# Altium PCB VOLTAGE_MEASURE_AC_RT.PcbDoc
Units mil, origin at the board's own origin, x right, y up, seen from the top; angles counter-clockwise.
Board outline 900 x 1360 mil, 2 copper layers (Top Layer, Bottom Layer); 12 components, 8 nets, 42 pads, 0 vias.
Unrouted connection lines stored in the file: 1.
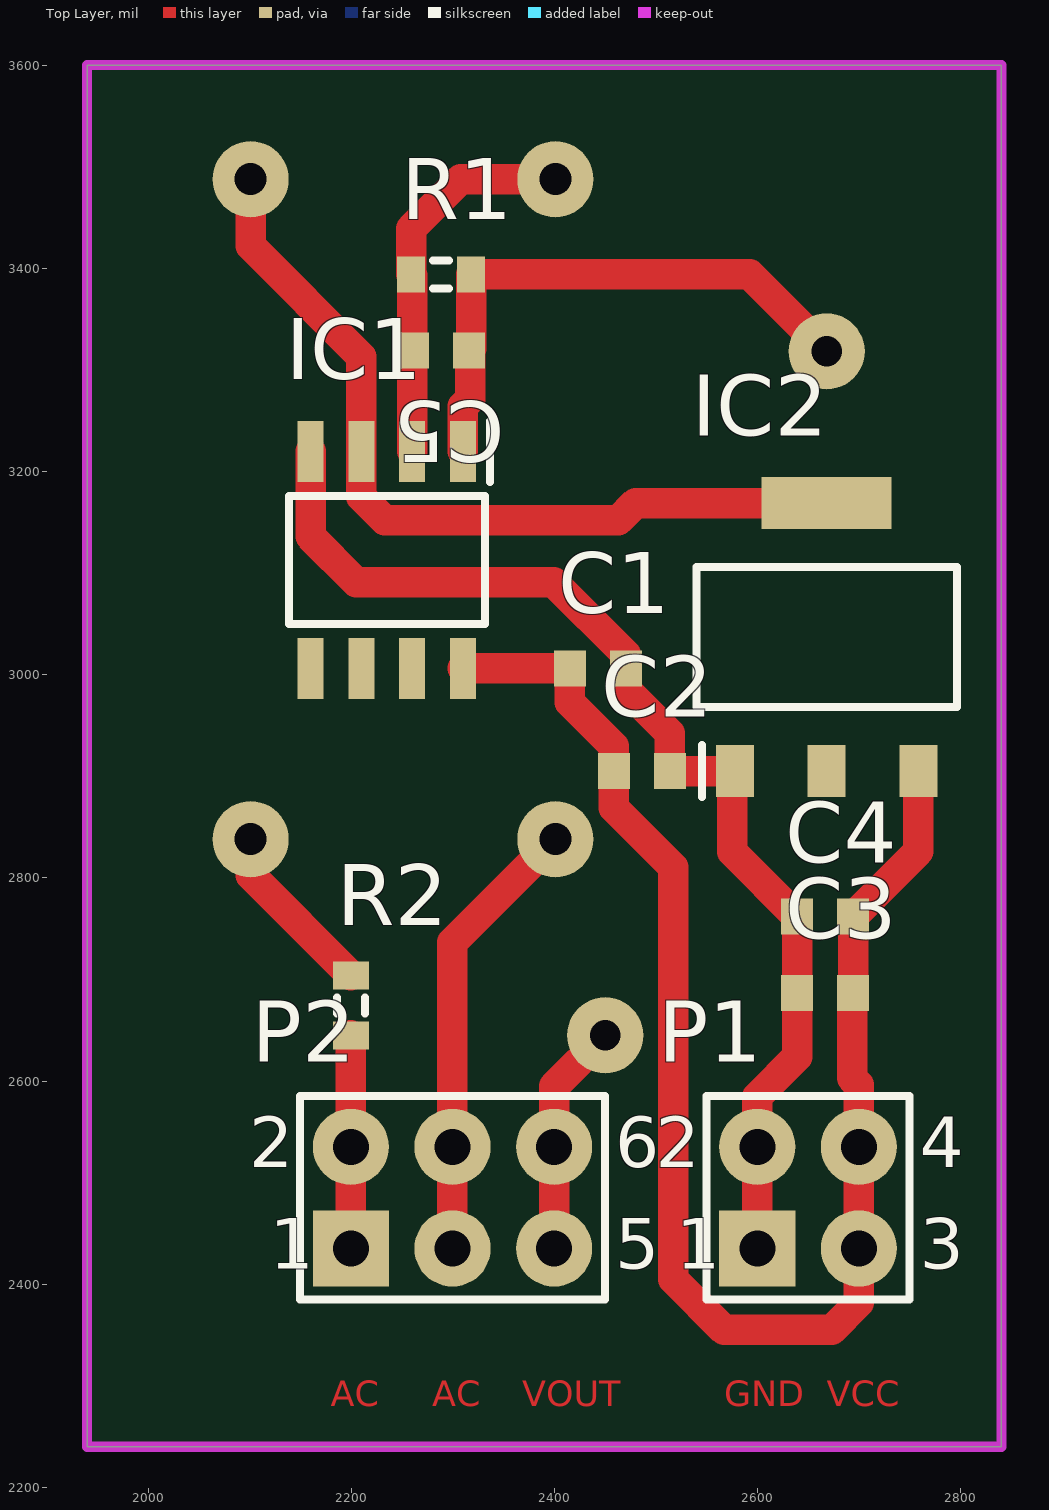
[diagram p0: Top Layer view]
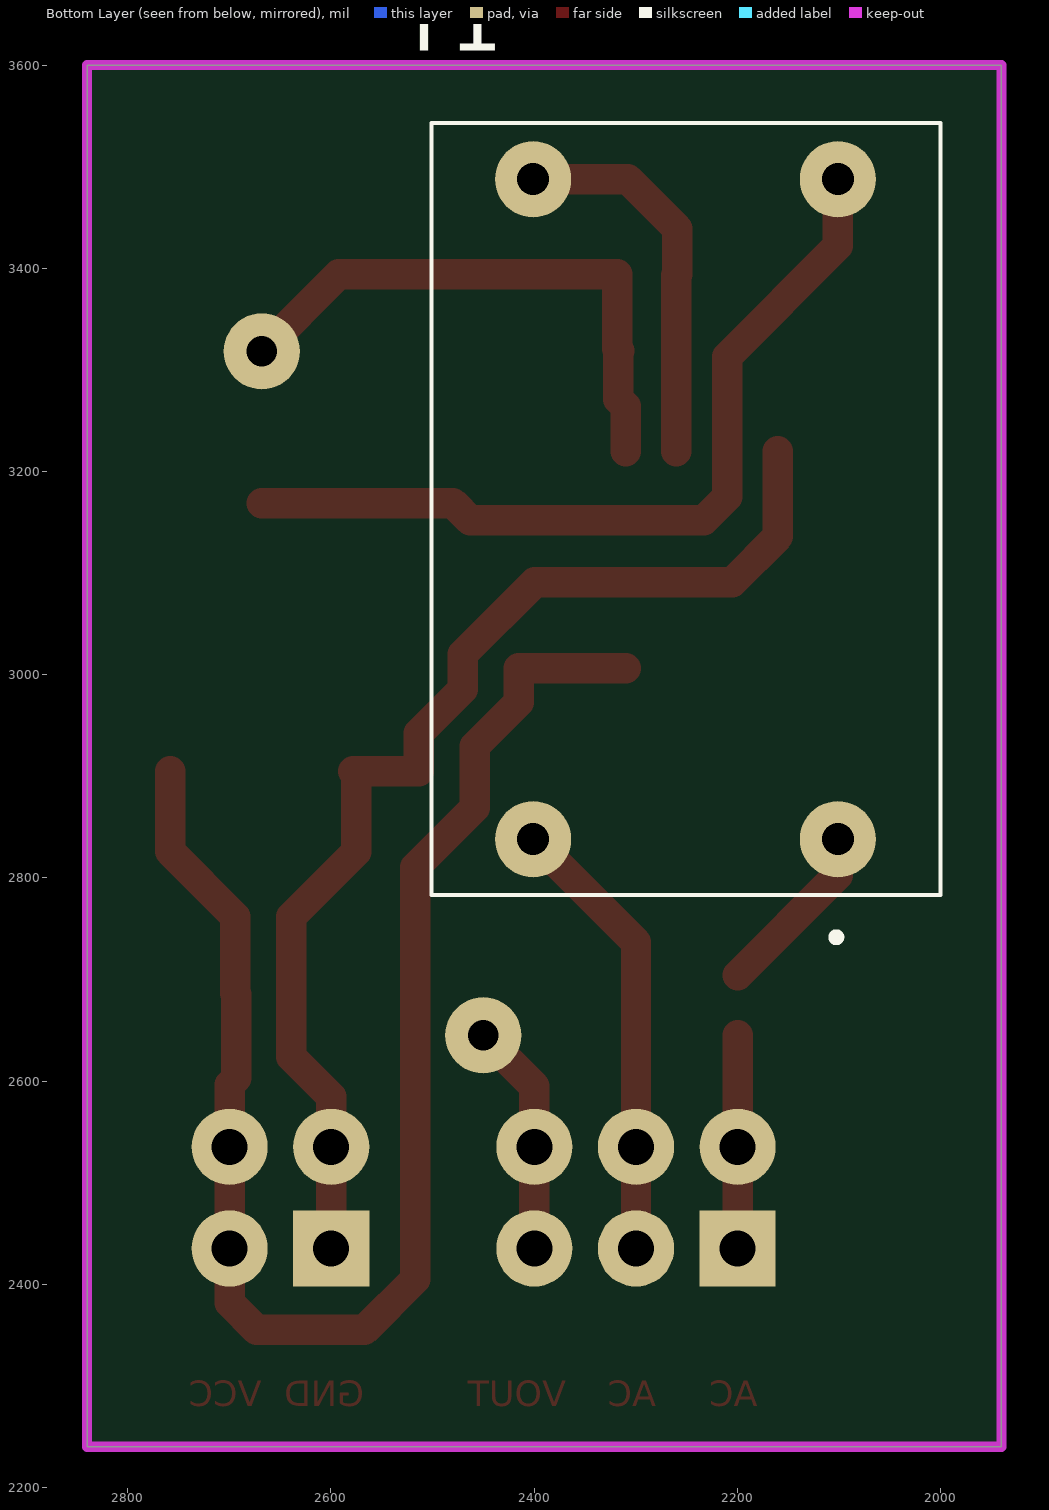
[diagram p1: Bottom Layer view, seen from below]

## Layer stack, top to bottom
Top Solder: solder mask 0.4, Solder Resist, Dk 3.5
Top Layer: signal copper 1.4
Dielectric 1: dielectric 12.6, FR-4, Dk 4.8
Bottom Layer: signal copper 1.4
Bottom Solder: solder mask 0.4, Solder Resist, Dk 3.5

## Board outline
1940,2240 1940,3600 2840,3600 2840,2240

## Design rules (kind name [scope] priority, off if disabled: settings)
Clearance [All] p1: gap=10 ignorepadtopadclearanceinfootprint=FALSE except(0: Arc-Hole Track-Hole SMDPad-Hole THPad-Hole Via-Hole Fill-Hole Poly-Hole Region-Hole Text-Hole)
PolygonConnect [All] p1: connectstyle=Relief reliefconductorwidth=10 reliefentries=4 polygonreliefangle="90 Angle" airgapwidth=10
RoomDefinition VOLTAGE_MEASURE_AC_RT [InComponentClass('VOLTAGE_MEASURE_AC_RT')] p1: confinementstyle=ConfineIn formatcopy=TRUE lockcomponents=FALSE outline 1940,2240 2838,2240 2838,3600 1940,3600
RoutingVias [All] p1: holewidth=28 width=50 viastyle="Through Hole" minholewidth=28 minwidth=50 maxholewidth=28 maxwidth=50
SolderMaskExpansion [All] p1: expansion=4
Width [All] p1: maxlimit=50 minlimit=10 preferedwidth=30 bottomlayer_maxwidth=10 bottomlayer_prefwidth=10 minimp=50.000000 maximp=50.000000 favimp=50.000000
30 further rules are at their usual default settings.

## Components (designator, comment, footprint, x,y, rotation, side; value= is the part's Value field where it differs from the comment)
C1 "Cap" 1608[0603] 2442.67,3006.23 r0 top value=10uF
C2 "Cap" 1608[0603] 2486,2905.11 r0 top value=10nF
C3 "Cap" 1608[0603] 2666.43,2686.65 r180 top value=10uF
C4 "Cap" 1608[0603] 2666.43,2761.8 r180 top value=10nF
C5 "Cap" 1608[0603] 2288.56,3319 r0 top value=10nF
IC1 "AD8572ARZ" SOIC127P600X175-8N 2235,3113 r270 top
IC2 "ams1117-1.5v" SOT229P700X180-4N 2668,3037 r90 top
P1 "Header 2X2" HDR2X2 2599.68,2435.2 r0 top
P2 "Header 3X2" HDR2X3 2199.69,2435.2 r0 top
R1 "Res1" J1-0603 2288.56,3394 r0 top value=6.5K
R2 "Res1" J1-0603 2199.69,2674.53 r90 top value=100K
T1 "zmpt107" zmpt107 2201,3140.17 r90 bottom

## Footprints (in the part's own frame and the unit in brackets; to place one, negate y for a bottom-side part, rotate by r counter-clockwise, add the part's x,y. Pads: shape width x height; smd on the part's side, far side on the other; paste and mask are expansions set on the pad)
1608[0603] [mm] "Chip Capacitor, Body 1.6x0.8mm, IPC High Density"
  rect 0.8x0.9 smd: 1(-0.7,0) 2(0.7,0)
  body extent -0.87,-0.48 0.87,0.48, height 1.3
HDR2X2 [mm] "Connector; Header; 2x2 Position"
  rect 1.905x1.905 hole 0.9: 1(0,0)
  round 1.905 hole 0.9: 2(0,2.54) 3(2.54,0) 4(2.54,2.54)
  silkscreen extent -1.27,-1.27 3.81,3.81
HDR2X3 [mm] "Connector; Header; 3x2 Position"
  rect 1.905x1.905 hole 0.9: 1(0,0)
  round 1.905 hole 0.9: 2(0,2.54) 3(2.54,0) 4(2.54,2.54) 5(5.08,0) 6(5.08,2.54)
  silkscreen extent -1.27,-1.27 6.35,3.81
J1-0603 [mm] "Chip Resistor, Body 1.6x0.8mm, IPC High Density"
  rect 0.7x0.9 smd: 1(-0.75,0) 2(0.75,0)
  silkscreen extent -0.2,-0.35 0.2,0.35, body extent -0.85,-0.48 0.85,0.48, height 0.9
SOIC127P600X175-8N [mm]
  rect 1.525x0.65 smd: 1(-2.712,1.905) 2(-2.712,0.635) 3(-2.712,-0.635) 4(-2.712,-1.905) 5(2.712,-1.905) 6(2.712,-0.635) 7(2.712,0.635) 8(2.712,1.905)
  silkscreen extent -3.47,-2.45 1.6,2.58, body extent -3,-2.45 3,2.45, height 1.75
SOT229P700X180-4N [mm]
  rect 1.3x0.95 smd: 1(-3.35,2.29) 2(-3.35,0) 3(-3.35,-2.29)
  rect 1.3x3.25 smd: 4(3.35,0)
  silkscreen extent -4,-3.25 1.75,3.25, body extent -3.5,-3.25 3.5,3.25, height 1.8
zmpt107 [mm]
  round 1.905 hole 0.8: 1(-7.675,-2.54) 2(-7.675,5.08) 3(8.825,-2.54) 4(8.825,5.08)
  silkscreen extent -10.22,-5.1 10.23,7.62

## Part data
C1 C2 C3 C4 C5: "Capacitor", LatestRevisionDate=17-Jul-2002, LatestRevisionNote="Re-released for DXP Platform.", PackageDescription="Radial Cap, Thru-Hole; 2 Leads; 0.3 in Pin Spacing", PackageReference=RAD-0.3, Published=8-Jun-2000, Publisher="Altium Limited"
IC1: "Integrated Circuit", Manufacturer_Name="Analog Devices", Mouser Part Number=584-AD8572ARZ, RS Part Number=5387447P, Datasheet Link=http://www.analog.com/static/imported-files/data_sheets/AD8571_8572_8574.pdf, Height=1.75mm, Manufacturer_Part_Number=AD8572ARZ, Mouser Price/Stock=https://www.mouser.com/Search/Refine.aspx?Keyword=584-AD8572ARZ, RS Price/Stock=http://uk.rs-online.com/web/p/products/5387447P
IC2: library part ams1117-3.3v, "Integrated Circuit", Manufacturer_Name="Advanced Monolithic Systems", Datasheet Link=http://www.advanced-monolithic.com/pdf/ds1117.pdf, Height=1.8mm, Manufacturer_Part_Number=ams1117-3.3v
P1: "Header, 2-Pin, Dual row", LatestRevisionDate=17-Jul-2002, LatestRevisionNote="Re-released for DXP Platform.", Publisher="Altium Limited"
P2: "Header, 3-Pin, Dual row", LatestRevisionDate=17-Jul-2002, LatestRevisionNote="Re-released for DXP Platform.", Publisher="Altium Limited"
R1 R2: "Resistor", LatestRevisionDate=17-Jul-2002, LatestRevisionNote="Re-released for DXP Platform.", PackageDescription="Axial Device, Thru-Hole; 2 Leads; 0.3 in Pin Spacing", PackageReference=AXIAL-0.3, Published=8-Jun-2000, Publisher="Altium Limited"
T1: "Transformer", Manufacturer_Name=ZEMING-E, Datasheet Link=http://www.zeming-e.com/English/search.jsp, Height=18mm, Manufacturer_Part_Number=zmpt107

## Free pads (board coordinates)
  round 75 hole 30: 2(2668,3318.12) 3(2450,2645)

## Nets (pads, with @x,y where several pads share a name; then routed paths per layer and width w, separated by ;. In a path a pad name is that pad's centre, name@x,y a point inside that pad or via, vN(x,y) a via of type N, cw(c..) or ccw(c..) an arc to the next point about the centre after c; other vN are vias at no path point)
AC_IN1: P2.1 P2.2 R2.1 | length 209.8
  Top Layer w30: P2.1 P2.2 R2.1
AC_IN2: P2.3 P2.4 T1.2 | length 444.8
  Top Layer w30: P2.3 P2.4 2299.69,2736.69 T1.2
GND: C1.2 C2.2 C3.2 C4.2 IC1.4 IC2.1 P1.1 P1.2 | length 1148.9
  Top Layer w30: IC1.4 2160,3136 2205,3091 2399.16,3091 2470.23,3019.93 C1.2 2470.23,2985.77 2513.56,2942.44 C2.2 IC2.1 ; IC2.1@2575,2902.27 2575,2825.67 C4.2 C3.2 2638.87,2623.87 2599.68,2584.68 P1.2 P1.1
NetC5_1: C5.1 IC1.2 R1.1 T1.4 | length 381.7
  Top Layer w30: IC1.2 2260,3393.03 R1.1 2259.03,3439.03 2307.61,3487.61 T1.4
NetIC1_3: IC1.3 IC2.4 T1.3 | length 832.3
  Top Layer w30: T1.3 2101,3422 2210,3313 IC1.3 2210,3175 2233,3152 2463,3152 2479.89,3168.89 IC2.4
NetR2_2: R2.2 T1.1 | length 174.8
  Top Layer w30: T1.1 2101,2802.74 R2.2
VCC: C1.1 C2.1 C3.1 C4.1 IC1.8 IC2.3 P1.3 P1.4 | length 1516.2
  Top Layer w30: IC1.8 C1.1 2415.11,2972.89 2458.44,2929.56 C2.1 2458.44,2868.95 2517,2810.39 2517,2405 2567,2355 2673,2355 2699.68,2381.68 P1.3 P1.4 2699.68,2596.32 2693,2603 2693,2685.66 C3.1 C4.1 2758.16,2825.98 IC2.3
VOUT: C5.2 IC1.1 P2.5 P2.6 pad.2 pad.3 R1.2 | length 790.3
  Top Layer w30: IC1.1 2310,3264 2317,3271 2317,3318.12 C5.2 2318.09,3320.97 R1.2 2592.12,3394 pad.2 ; P2.5 P2.6 2399.69,2594.69 pad.3
pads on no net: IC1.5 IC1.6 IC1.7 IC2.2

## Keep-outs
Keep-Out Layer:
  lines w10: 1940,2240 2840,2240 2840,3600 1940,3600 1940,2260 1940,2240

## Other copper
Top Layer:
  text "AC" at 2180,2280 h25
  text "AC" at 2280,2280 h25
  text "VOUT" at 2368.32,2280 h25
  text "GND" at 2567,2280 h25
  text "VCC" at 2668,2280 h25

## Text inside footprints (layer, text, board x,y; h text height)
P1: Top Overlay "1" at 2519.68,2415.2 h50; Top Overlay "2" at 2499.68,2515.2 h50; Top Overlay "4" at 2759.68,2515.2 h50; Top Overlay "3" at 2759.68,2415.2 h50
P2: Top Overlay "6" at 2459.69,2515.2 h50; Top Overlay "5" at 2459.69,2415.2 h50; Top Overlay "2" at 2099.69,2515.2 h50; Top Overlay "1" at 2119.69,2415.2 h50